# EAGLE board Mixmaker_schematic (EAGLE 8.2.2)

Size 71.12 x 58.42 mm. Coordinates in mm from the lower left corner, seen from the top.
Outline: 0,0 71.12,0 71.12,58.42 0,58.42 0,0
Copper layers (1*16): Top 0.035mm / dielectric 1.5mm / Bottom 0.035mm
Design rules "default": minimum track width 6mil, minimum drill 0.35mm, track to track 6mil, track to pad 6mil, pad to pad 6mil, via to via 6mil, smd to smd 6mil, copper to edge 40mil, drill to drill 6mil, minimum pad ring 10mil, minimum via ring 8mil, stop-mask expansion 4mil, vias tented up to drill 0mil, thermal gap 10mil

## Footprints (pad centres in the part's own frame; a part is rotated, then mirrored left to right if it is on the bottom)
1X07 = drill 1.016 long: 1 -7.62,0; 2 -5.08,0; 3 -2.54,0; 4 0,0; 5 2.54,0; 6 5.08,0; 7 7.62,0
1X02 = drill 1.016 long: 1 -1.27,0; 2 1.27,0
0204/7 = drill 0.813 pad 1.676 octagon: 1 -3.81,0; 2 3.81,0
TO92-EBC-OVAL = drill 0.813 long: B 0,-1.27; C 2.54,-1.27; E -2.54,-1.27
ESP12E_DEVKIT = drill 0.8 pad 1.93: 3V3@0 -11.43,-7.62; 3V3@1 11.43,5.08; 3V3@2 11.43,-17.78; AD0 -11.43,17.78; CLK -11.43,-2.54; CMD -11.43,2.54; D0 11.43,17.78; D1 11.43,15.24; D2 11.43,12.7; D3 11.43,10.16; D4 11.43,7.62; D5 11.43,0; D6 11.43,-2.54; D7 11.43,-5.08; D8 11.43,-7.62; EN -11.43,-10.16; GND@0 -11.43,-5.08; GND@1 -11.43,-15.24; GND@2 11.43,2.54; GND@3 11.43,-15.24; RST -11.43,-12.7; RSV@0 -11.43,15.24; RSV@1 -11.43,12.7; RX 11.43,-10.16; SD0 -11.43,0; SD1 -11.43,5.08; SD2 -11.43,7.62; SD3 -11.43,10.16; TX 11.43,-12.7; VIN -11.43,-17.78 | hole 3.2: -10.16,21.59; 10.16,21.59; 10.16,-21.59; -10.16,-21.59

## Placement (x,y rotation side)
JP1  [1X07]  53.34,45.72 270 top
JP2  [1X07]  50.8,45.72 270 top
JP3  [1X02]  48.26,39.37 90 top
R1  1K  [0204/7]  36.83,55.88 180 top
R2  1K  [0204/7]  36.83,50.8 180 top
R3  1K  [0204/7]  36.83,45.72 180 top
R4  1K  [0204/7]  36.83,38.1 180 top
R5  1K  [0204/7]  36.83,33.02 180 top
T1  2N2222  [TO92-EBC-OVAL]  40.64,54.61 0 top
T2  2N2222  [TO92-EBC-OVAL]  40.64,49.53 0 top
T3  2N2222  [TO92-EBC-OVAL]  40.64,44.45 0 top
T4  2N2222  [TO92-EBC-OVAL]  40.64,36.83 0 top
T5  2N2222  [TO92-EBC-OVAL]  40.64,33.02 0 top
U$1  ESP12E_DEVKIT  [ESP12E_DEVKIT]  13.97,38.1 0 top

## Library data of the parts
JP1-JP3 = pinhead
R1-R5 T1-T5 = adafruit
U$1 = ESP12E_DEVKIT

## Nets
N$1: JP1.6 JP1.7 U$1.VIN
N$3: R1.2 U$1.D0
N$4: R2.2 U$1.D1
N$5: R3.2 U$1.D2
N$6: R4.2 U$1.D5
N$7: R5.2 U$1.D6
N$8: JP3.1 U$1.D4
N$9: JP3.2 U$1.D3
N$10: JP2.5 T5.C
N$11: R1.1 T1.B
N$12: R2.1 T2.B
N$13: R3.1 T3.B
N$14: R4.1 T4.B
N$15: R5.1 T5.B
N$16: T1.E T2.E T3.E T4.E T5.E U$1.GND@2
N$17: JP2.4 T4.C
N$18: JP2.3 T3.C
N$19: JP2.2 T2.C
N$20: JP2.1 T1.C
N$21: JP1.1 JP1.2 JP1.3 JP1.4 JP1.5 U$1.3V3@1
N$22: JP2.6 JP2.7 U$1.GND@3

## Tracks (layer width: path | path; a pad name or v marks a point on that pad's centre or on a via)
N$1  (2 unrouted)
N$3  (1 unrouted)
N$4  (1 unrouted)
N$5  (1 unrouted)
N$6  (1 unrouted)
N$7  (1 unrouted)
N$8  (1 unrouted)
N$9  (1 unrouted)
N$10  (1 unrouted)
N$11  (1 unrouted)
N$12  (1 unrouted)
N$13  (1 unrouted)
N$14  (1 unrouted)
N$15  (1 unrouted)
N$16  (5 unrouted)
N$17  (1 unrouted)
N$18  (1 unrouted)
N$19  (1 unrouted)
N$20  (1 unrouted)
N$21  (5 unrouted)
N$22  (2 unrouted)